# Altium PCB ESP32.PcbDoc
Units mil, origin at the board's own origin, x right, y up, seen from the top; angles counter-clockwise.
Board outline 1970 x 1965 mil, 2 copper layers (Top Layer, Bottom Layer); 21 components, 52 nets, 183 pads, 12 vias.
Unrouted connection lines stored in the file: 19.
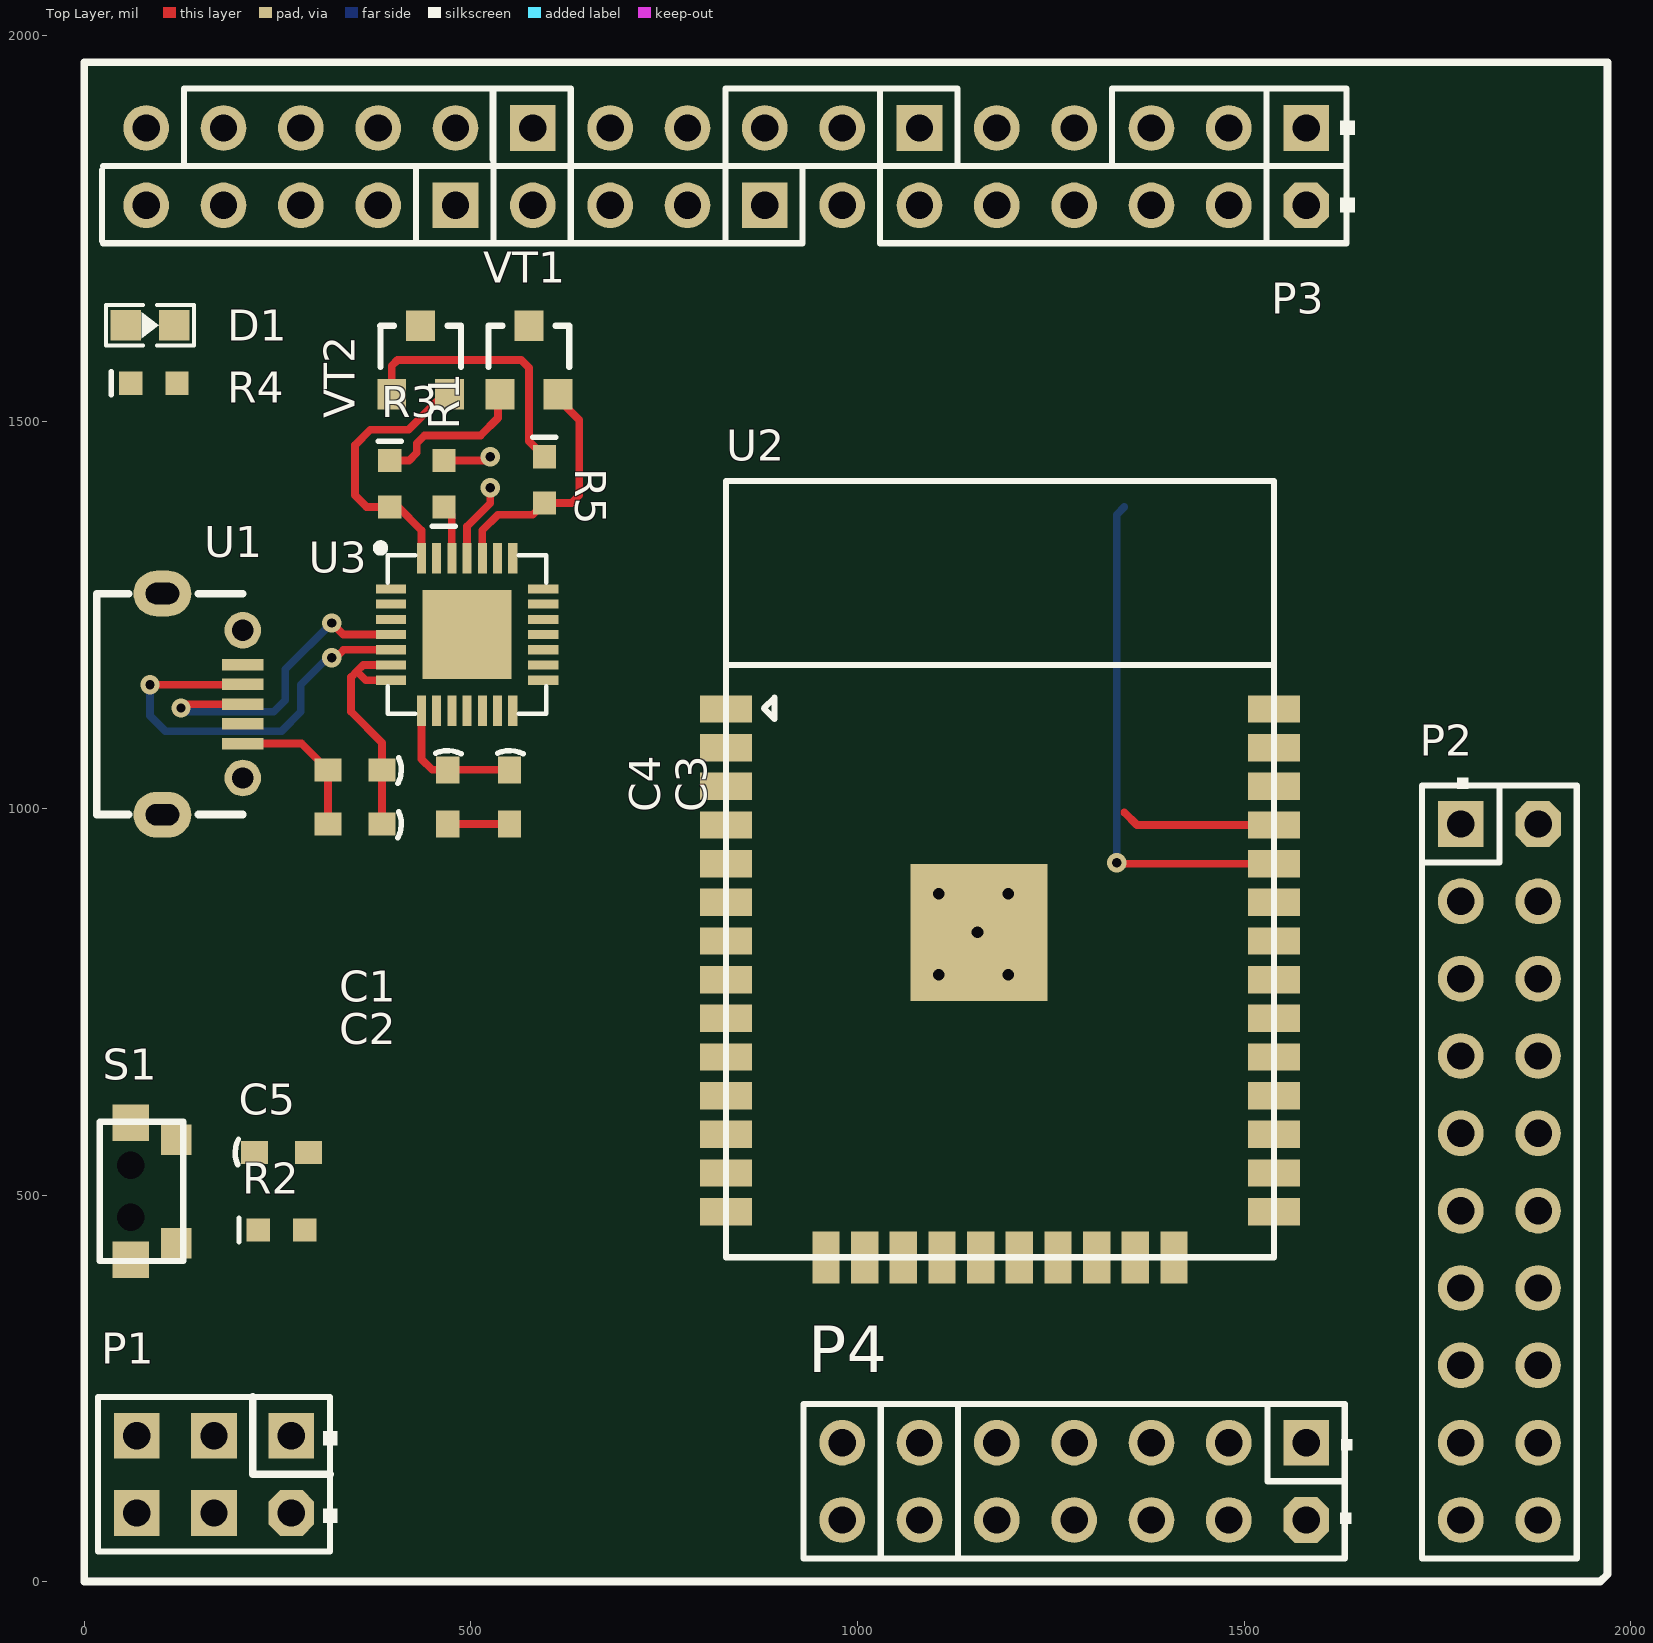
[diagram p0: Top Layer view]
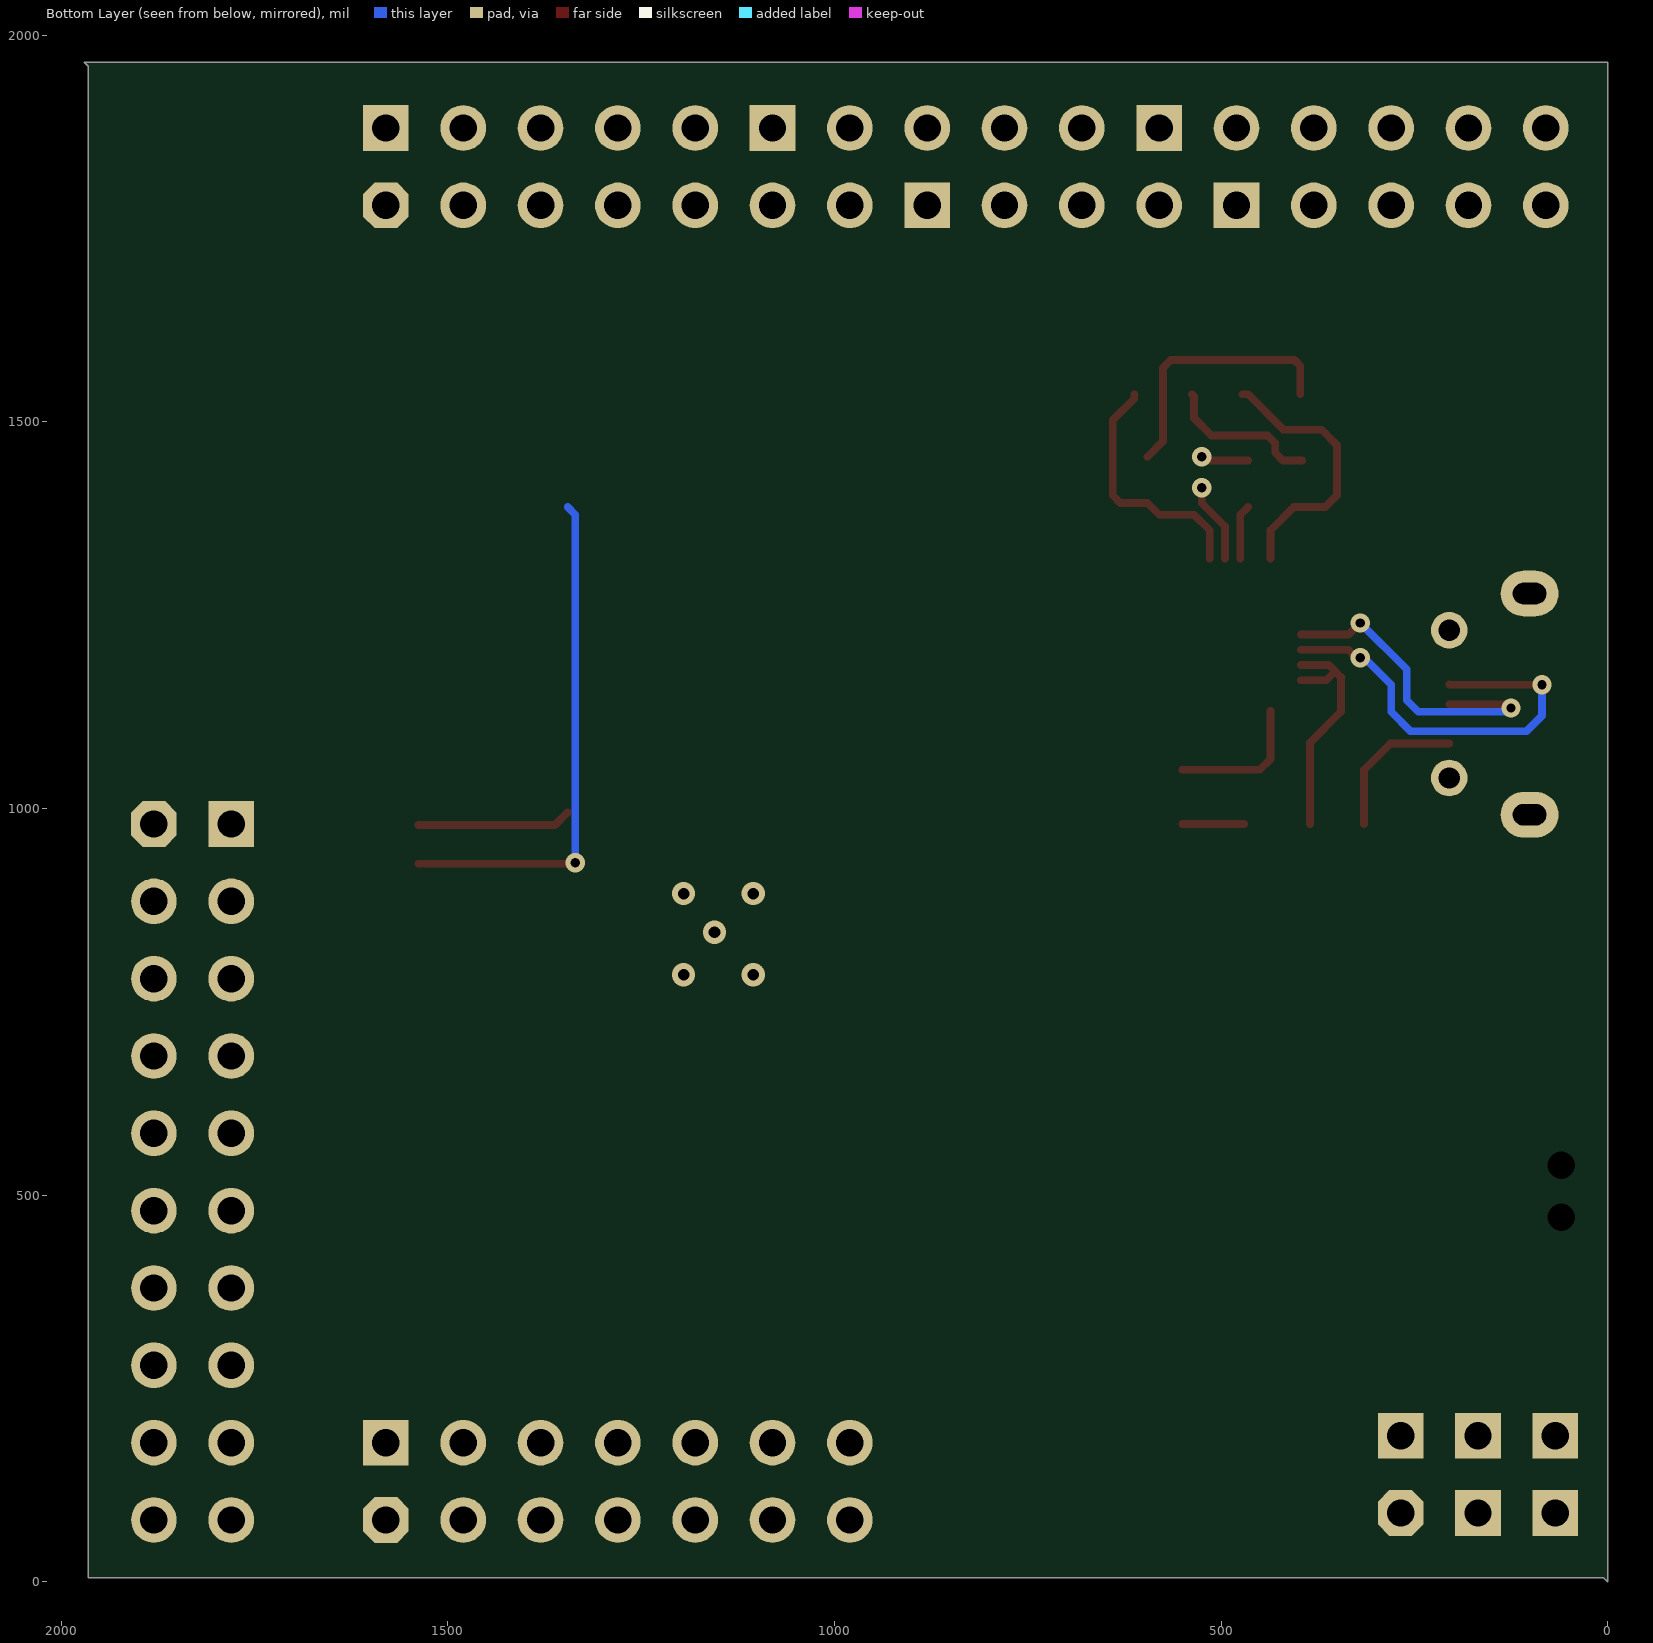
[diagram p1: Bottom Layer view, seen from below]

## Layer stack, top to bottom
Top Solder: solder mask 0.4, Solder Resist, Dk 3.5
Top Layer: signal copper 1.4
Dielectric 1: dielectric 12.6, FR-4, Dk 4.8
Bottom Layer: signal copper 1.4
Bottom Solder: solder mask 0.4, Solder Resist, Dk 3.5

## Board outline
0,0 5,5 1965,5 1965,1960 1970,1965 0,1965

## Design rules (kind name [scope] priority, off if disabled: settings)
Clearance [All] p1: gap=10 ignorepadtopadclearanceinfootprint=FALSE except(0: Arc-Hole Track-Hole SMDPad-Hole THPad-Hole Via-Hole Fill-Hole Poly-Hole Region-Hole Text-Hole)
DiffPairsRouting [All] p1: maxlimit=10 minlimit=10 mostfreqgap=10 toplayer_minwidth=10 toplayer_maxwidth=15 toplayer_prefwidth=15 bottomlayer_minwidth=10 bottomlayer_maxwidth=15 bottomlayer_prefwidth=15 maxuncoupledlength=500
PolygonConnect [All] p1: connectstyle=Relief reliefconductorwidth=10 reliefentries=4 polygonreliefangle="90 Angle" airgapwidth=10
RoomDefinition ESP32 [InComponentClass('ESP32')] p1: confinementstyle=ConfineIn formatcopy=TRUE lockcomponents=FALSE outline 0,5 1965,5 1965,1965 0,1965
RoutingVias [All] p1: holewidth=12 width=25 viastyle="Through Hole" minholewidth=12 minwidth=25 maxholewidth=28 maxwidth=50
SolderMaskExpansion [All] p1: expansion=4
Width [All] p1: maxlimit=10 minlimit=10 preferedwidth=10
29 further rules are at their usual default settings.

## Classes and differential pairs
differential pair D: +D_P -D_N

## Components (designator, comment, footprint, x,y, rotation, side; value= is the part's Value field where it differs from the comment)
C1 "10uF" C0603L 350,1050 r180 top
C2 "100nF" C0603L 350,980 r180 top
C3 "10uF" C0603L 550,1015 r270 top
C4 "100nF" C0603L 470,1015 r270 top
C5 "100nF" C0603L 255,555 r0 top
D1 "RED" SMT_LED_0603 85,1625 r0 top
P1 "WIKIPWR-6P" WIKIPWR-6P 267.72,188.98 r180 top locked
P2 "WIKIGPIO-D" WIKIGPIO-U 1780,980 r270 top locked
P3 "WIKIPRHL-R" WIKIPRHL-R 1580,1880 r180 top locked
P4 "WIKIADA" WIKIADA 1580,180 r180 top locked
R1 "470" R0603 465,1420 r90 top
R2 "100K" R0603 255,455 r0 top
R3 "12k" R0603 395,1420 r270 top
R4 "1K" R0603 90,1550 r0 top
R5 "12k" R0603 595,1425 r270 top
S1 "RESET" KEY-2x4-SMD 60,505 r90 top
U1 "USB_Micro_5S_B" USB_MICRO_5S_B 205,1135 r90 top
U2 "ESP-32S Wi-Fi Module" ESP-32S 1145,895 r0 top
U3 "CP2102" QFN28 495,1225 r0 top
VT1 "S8050" SMT_TRIODE_NPN 575,1580 r0 top
VT2 "S8050" SMT_TRIODE_NPN 435,1580 r0 top

## Footprints (in the part's own frame and the unit in brackets; to place one, negate y for a bottom-side part, rotate by r counter-clockwise, add the part's x,y. Pads: shape width x height; smd on the part's side, far side on the other; paste and mask are expansions set on the pad)
C0603L [mil]
  rect 35x30 smd: 1(-35,0) 2(35,0)
  silkscreen extent -60,-16 -56,18, body extent -31,-16 32,15, height 24
ESP-32S [mm]
  rect 1.7x0.9 smd: 1(-8.009,5.937) 2(-8.009,4.667) 3(-8.009,3.397) 4(-8.009,2.127) 5(-8.009,0.857) 6(-8.009,-0.413) 7(-8.009,-1.683) 8(-8.009,-2.953) 9(-8.009,-4.223) 10(-8.009,-5.493) 11(-8.009,-6.763) 12(-8.009,-8.033) 13(-8.009,-9.303) 14(-8.009,-10.573) 25(9.991,-10.573) 26(9.991,-9.303) 27(9.991,-8.033) 28(9.991,-6.763) 29(9.991,-5.493) 30(9.991,-4.223) 31(9.991,-2.953) 32(9.991,-1.683) 33(9.991,-0.413) 34(9.991,0.857) 35(9.991,2.127) 36(9.991,3.397) 37(9.991,4.667) 38(9.991,5.937)
  rect 0.9x1.7 smd: 15(-4.719,-12.083) 16(-3.449,-12.083) 17(-2.179,-12.083) 18(-0.909,-12.083) 19(0.361,-12.083) 20(1.631,-12.083) 21(2.901,-12.083) 22(4.171,-12.083) 23(5.441,-12.083) 24(6.711,-12.083)
  rect 4.5x4.5 smd: 39(0.311,-1.403)
  silkscreen extent -8.01,-12.07 9.99,13.43
KEY-2x4-SMD [mm] "6.8MM,2.8MM,SMD"
  rect 1.2x1.2 smd: 0(-2.25,0) 0(2.25,0)
  rect 1x1 smd: 1(-1.7,-1.5) 2(1.7,-1.5)
  round 0.8 hole 0.9 unplated: MH1(0.85,0) MH2(-0.85,0)
  silkscreen extent -2.29,-1.73 2.29,1.02, body extent -2.28,-1.6 2.29,0.94, height 1.1
QFN28 [mm]
  rect 1x0.3 smd: 1(-2.5,1.5) 2(-2.5,1) 3(-2.5,0.5) 4(-2.5,0) 5(-2.5,-0.5) 6(-2.5,-1) 7(-2.5,-1.5) 15(2.5,-1.5) 16(2.5,-1) 17(2.5,-0.5) 18(2.5,0) 19(2.5,0.5) 20(2.5,1) 21(2.5,1.5)
  rect 0.3x1 smd: 8(-1.5,-2.5) 9(-1,-2.5) 10(-0.5,-2.5) 11(0,-2.5) 12(0.5,-2.5) 13(1,-2.5) 14(1.5,-2.5) 22(1.5,2.5) 23(1,2.5) 24(0.5,2.5) 25(0,2.5) 26(-0.5,2.5) 27(-1,2.5) 28(-1.5,2.5)
  rect 2.921x2.921 smd paste-3.2: 29(0,0)
  silkscreen extent -2.97,-2.6 2.6,2.97, body extent -2.5,-2.5 2.5,2.5, height 1
R0603 [mil]
  rect 30x30 smd: 1(-30,0) 2(30,0)
  silkscreen extent -55,-15 -55,15, body extent -31,-16 32,15, height 18
SMT_LED_0603 [mm] "SMT LED"
  rect 1x1 smd: 1(-0.8,0) 2(0.8,0)
  silkscreen extent -1.45,-0.66 1.45,0.66, body extent -0.81,-0.4 0.81,0.4, height 0.6
SMT_TRIODE_NPN [mm] "Surface mount NPN transistor, package SOT-23"
  rect 0.95x1 smd: 1(-0.95,-1.125) 2(0.95,-1.125) 3(0,1.125)
  silkscreen extent -1.33,-0.22 1.32,1.13, body extent -1.45,-1.4 1.45,1.4, height 1.3
USB_MICRO_5S_B [mil] "USB Micro SMT 5S B"
  oval 59.06x74.8 hole 27.56 slot 43.31 at 90 deg: 0(-143,104) 0(143,104)
  round 47.24 hole 27.5: 0(-95.5,0) 0(95.5,0)
  rect 15x54 smd: 1(51,0) 2(25.5,0) 3(0,0) 4(-25.5,0) 5(-51,0)
  silkscreen extent -143,0 143,189, body extent -161,-9 161,204, height 105
WIKIADA [mm] "Connector; Header; 7x2 Position"
  rect 1.5x1.5 hole 0.9: 1(0,0)
  oct 1.5x1.5 hole 0.9: 2(0,2.54)
  round 1.5 hole 0.9: 3(2.54,0) 4(2.54,2.54) 5(5.08,0) 6(5.08,2.54) 7(7.62,0) 8(7.62,2.54) 9(10.16,0) 10(10.16,2.54) 11(12.7,0) 12(12.7,2.54) 13(15.24,0) 14(15.24,2.54)
  silkscreen extent -1.52,-1.27 16.51,3.81, body extent -1.27,-1.55 16.51,4.07, height 8.51
WIKIGPIO-U [mm] "Connector; Header; 9x2 Position"
  rect 1.5x1.5 hole 0.9: 1(0,0)
  oct 1.5x1.5 hole 0.9: 2(0,2.54)
  round 1.5 hole 0.9: 3(2.54,0) 4(2.54,2.54) 5(5.08,0) 6(5.08,2.54) 7(7.62,0) 8(7.62,2.54) 9(10.16,0) 10(10.16,2.54) 11(12.7,0) 12(12.7,2.54) 13(15.24,0) 14(15.24,2.54) 15(17.78,0) 16(17.78,2.54) 17(20.32,0) 18(20.32,2.54) 19(22.86,0) 20(22.86,2.54)
  silkscreen extent -1.52,-1.27 24.13,3.81, body extent -1.29,-1.55 24.16,4.02, height 8.51
WIKIPRHL-R [mm] "Connector; Header; 16x2 Position"
  rect 1.5x1.5 hole 0.9: 1(0,0) 11(12.7,0) 16(17.78,2.54) 21(25.4,0) 24(27.94,2.54)
  oct 1.5x1.5 hole 0.9: 2(0,2.54)
  round 1.5 hole 0.9: 3(2.54,0) 4(2.54,2.54) 5(5.08,0) 6(5.08,2.54) 7(7.62,0) 8(7.62,2.54) 9(10.16,0) 10(10.16,2.54) 12(12.7,2.54) 13(15.24,0) 14(15.24,2.54) 15(17.78,0) 17(20.32,0) 18(20.32,2.54) 19(22.86,0) 20(22.86,2.54) 22(25.4,2.54) 23(27.94,0) 25(30.48,0) 26(30.48,2.54) 27(33.02,0) 28(33.02,2.54) 29(35.56,0) 30(35.56,2.54) 31(38.1,0) 32(38.1,2.54)
  silkscreen extent -1.6,-1.3 39.55,3.78, body extent -1.3,-1.63 39.43,4.04, height 8.51
WIKIPWR-6P [mm] "Connector; Header; 3x2 Position"
  rect 1.5x1.5 hole 0.9: 1(0,0) 3(2.54,0) 4(2.54,2.54) 5(5.08,0) 6(5.08,2.54)
  oct 1.5x1.5 hole 0.9: 2(0,2.54)
  silkscreen extent -1.52,-1.27 6.35,3.81, body extent -1.21,-1.65 6.44,4.02, height 8.51

## Part data
C1 C2 C3 C4: library part SMT_C_0402, "Surface mount capacitor 0402"
C5: library part CAP, "Capacitor"
D1: library part LED0, "Typical INFRARED GaAs LED"
P1: "PWR HDR"
P2: "Header, 9-Pin, Dual row"
P3: "Header, 16-Pin, Dual row"
P4: "Header, 14-Pin, Dual row"
R1 R3 R5: library part SMT_R_0402, "Surface mount resistor 0402"
R2: library part res1, "Resistor"
R4: library part Res2, "Resistor"
S1: library part SW-PB, "Switch"
U1: "USB micro female SMT with 4 fixed foot"
U2: library part ESP-32S
VT1 VT2: library part SMT_TRIODE_NPN, "Surface mount NPN transistor, package SOT-23"

## Via types
v1: diameter 25, hole 12, Top Layer to Bottom Layer, 7 vias
v2: diameter 30, hole 15, Top Layer to Bottom Layer, 5 vias

## Nets (pads, with @x,y where several pads share a name; then routed paths per layer and width w, separated by ;. In a path a pad name is that pad's centre, name@x,y a point inside that pad or via, vN(x,y) a via of type N, cw(c..) or ccw(c..) an arc to the next point about the centre after c; other vN are vias at no path point)
ACTIVE: U3.11
CLK: U2.20
CMD: U2.19
CTS: U3.23
D3V3: C1.1 C2.1 R2.2 U3.6 U3.7 | length 313.5
  Top Layer w10: C2.1 385,1085 345,1125 345,1170 352.5,1177.5 ; U3.7 364.05,1165.95 352.5,1177.5 ; U3.6 360.63,1185.63 352.5,1177.5
D_N: U1.2 U3.5 | length 544.2
  Top Layer w10: v1(85,1160) 204.5,1160 U1.2 ; v1@325,1195 335.32,1205.32 U3.5
  Bottom Layer w10: v1(85,1160) 85,1120 105,1100 255,1100 280,1125 280,1160 315,1195 v1@325,1195
  other v1: 320,1195
D_P: U1.3 U3.4 | length 450.1
  Top Layer w10: v1@120,1125 130,1135 U1.3 ; v1(320,1240) 335,1225 U3.4
  Bottom Layer w10: v1(125,1130) 120,1125 245,1125 260,1140 260,1180 v1(320,1240)
DCD: U3.1
DSR: U3.27
DTR: R3.2 U3.28 VT2.2 | length 355.8
  Top Layer w10: U3.28 435.95,1360 405.95,1390 R3.2 365,1390 350,1405 350,1470 370,1490 419.22,1490 464.92,1535.71 VT2.2
ESP_RX: R1.2 U2.34 | length 730.1
  Top Layer w10: R1.2 520,1450 v1(525,1455) ; v1(1335,930) 1340,930 1341.28,928.72 U2.34
  Bottom Layer w10: v1(1335,930) 1335,1380 1345,1390
ESP_SVN: U2.5
ESP_SVP: U2.4
ESP_TX: U2.35 U3.25 | length 304.1
  Top Layer w10: U3.25 495.01,1365.01 525,1395 v1(525,1415) ; 1345,995 1361.28,978.72 U2.35
GND: C1.2 C2.2 C3.2 C4.2 C5.1 D1.2 S1.1 U1.5 U2.1 U2.15 U2.38 U2.39 U3.3 U3.29 | length 274.1
  Top Layer w10: U1.5 281,1084 C1.2 C2.2 ; C4.2 C3.2
  other v2: 1105,785 1195,785 1155,840 1105,890 1195,890
IO0/PROG: U2.25
IO2: U2.24
IO4: U2.26
IO5: U2.29
IO12: U2.14
IO13: U2.16
IO14: U2.13
IO15: U2.23
IO16: U2.27
IO17: U2.28
IO18: U2.30
IO19: U2.31
IO21: U2.33
IO22: U2.36
IO23: U2.37
IO25: U2.10
IO26: U2.11
IO27: U2.12
IO32: U2.8
IO33: U2.9
IO34: U2.6
IO35: U2.7
NetD1_1: D1.1 R4.1
NetR1_1: R1.1 U3.26 | length 70.9
  Top Layer w10: R1.1 475.32,1379.68 U3.26
NetR3_1: R3.1 VT1.1 | length 201.9
  Top Layer w10: R3.1 420,1450 430,1460 430,1472.5 440,1482.5 512.5,1482.5 535,1505 535,1533.11 VT1.1
NetR5_1: R5.1 VT2.1 | length 344.8
  Top Layer w10: VT2.1 397.6,1572.6 405,1580 565,1580 575,1570 575,1475 R5.1
NRST: C5.2 R2.1 S1.2 U2.3 VT1.3
OTG_ID: U1.4
PROG: VT2.3
RI: U3.2
RTS: R5.2 U3.24 VT1.2 | length 322.5
  Top Layer w10: U3.24 514.69,1359.69 535,1380 580,1380 R5.2 630,1395 640,1405 640,1502.4 612.4,1530 VT1.2
SD0: U2.21
SD1: U2.22
SD2: U2.17
SD3: U2.18
VCC: U2.2
VDDUSB: C3.1 C4.1 U1.1 U3.8 | length 182.4
  Top Layer w10: U3.8 435.95,1064.05 450,1050 C4.1 C3.1
pads on no net: P1.1 P1.2 P1.3 P1.4 P1.5 P1.6 P2.1 P2.2 P2.3 P2.4 P2.5 P2.6 P2.7 P2.8 P2.9 P2.10 P2.11 P2.12 P2.13 P2.14 P2.15 P2.16 P2.17 P2.18 P2.19 P2.20 P3.1 P3.2 P3.3 P3.4 P3.5 P3.6 P3.7 P3.8 P3.9 P3.10 P3.11 P3.12 P3.13 P3.14 P3.15 P3.16 P3.17 P3.18 P3.19 P3.20 P3.21 P3.22 P3.23 P3.24 P3.25 P3.26 P3.27 P3.28 P3.29 P3.30 P3.31 P3.32 P4.1 P4.2 P4.3 P4.4 P4.5 P4.6 P4.7 P4.8 P4.9 P4.10 P4.11 P4.12 P4.13 P4.14 R4.2 S1.0 S1.MH1 S1.MH2 U1.0 U2.32 U3.9 U3.10 U3.12 U3.13 U3.14 U3.15 U3.16 U3.17 U3.18 U3.19 U3.20 U3.21 U3.22

## Silkscreen, mask and mechanical layers (free items; w line width, h text height)
Top Overlay:
  lines w10: 0,0 0,1965 1970,1965 1970,1925 1970,10 1960,0 0,0